# Altium PCB JacdacEdgeConnectorDimsTest 92.PcbDoc
Units mm, origin at the board's own origin, x right, y up, seen from the top; angles counter-clockwise.
Board outline 84.54 x 20.7 mm, 2 copper layers (Top Layer, Bottom Layer), stack 1.525 mm thick; 16 components, 0 nets, 176 pads, 16 vias.
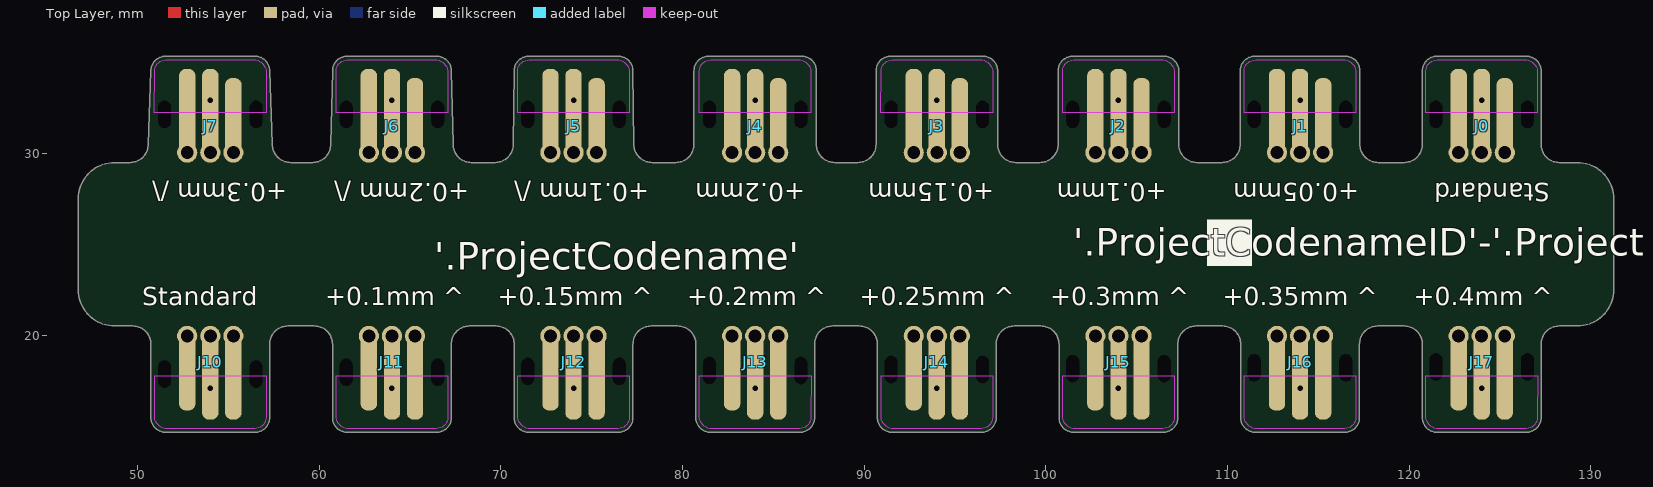
[diagram p0: Top Layer view]
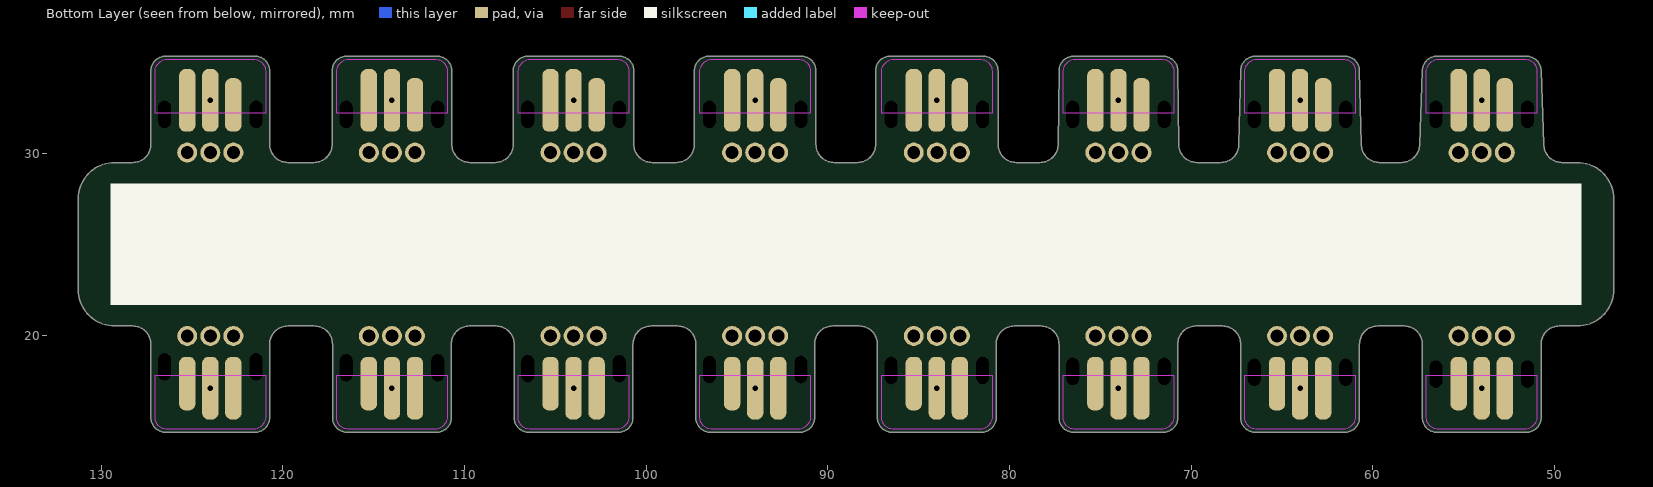
[diagram p1: Bottom Layer view, seen from below]

## Layer stack, top to bottom
Top Solder: solder mask 0.0102, Solder Resist, Dk 3.5
Top Layer: signal copper 0.0356
Dielectric 1: core 1.454, FR-4, Dk 4.2
Bottom Layer: signal copper 0.0356
Bottom Solder: solder mask 0.0102, Solder Resist, Dk 3.5

## Board outline
50.73,15.45 ccw(c51.53,15.45) 51.53,14.65 56.47,14.65 ccw(c56.47,15.45) 57.27,15.45 57.27,19.5 cw(c58.27,19.5) 58.27,20.5 59.73,20.5 cw(c59.73,19.5) 60.73,19.5 60.73,15.45 ccw(c61.53,15.45) 61.53,14.65 66.47,14.65 ccw(c66.47,15.45) 67.27,15.45 67.27,19.5 cw(c68.27,19.5) 68.27,20.5 69.73,20.5 cw(c69.73,19.5) 70.73,19.5 70.73,15.45 ccw(c71.53,15.45) 71.53,14.65 76.47,14.65 ccw(c76.47,15.45) 77.27,15.45 77.27,19.5 cw(c78.27,19.5) 78.27,20.5 79.73,20.5 cw(c79.73,19.5) 80.73,19.5 80.73,15.45 ccw(c81.53,15.45) 81.53,14.65 86.47,14.65 ccw(c86.47,15.45) 87.27,15.45 87.27,19.5 cw(c88.27,19.5) 88.27,20.5 89.73,20.5 cw(c89.73,19.5) 90.73,19.5 90.73,15.45 ccw(c91.53,15.45) 91.53,14.65 96.47,14.65 ccw(c96.47,15.45) 97.27,15.45 97.27,19.5 cw(c98.27,19.5) 98.27,20.5 99.73,20.5 cw(c99.73,19.5) 100.73,19.5 100.73,15.45 ccw(c101.53,15.45) 101.53,14.65 106.47,14.65 ccw(c106.47,15.45) 107.27,15.45 107.27,19.5 cw(c108.27,19.5) 108.27,20.5 109.73,20.5 cw(c109.73,19.5) 110.73,19.5 110.73,15.45 ccw(c111.53,15.45) 111.53,14.65 116.47,14.65 ccw(c116.47,15.45) 117.27,15.45 117.27,19.5 cw(c118.27,19.5) 118.27,20.5 119.73,20.5 cw(c119.73,19.5) 120.73,19.5 120.73,15.45 ccw(c121.53,15.45) 121.53,14.65 126.47,14.65 ccw(c126.47,15.45) 127.27,15.45 127.27,19.5 cw(c128.27,19.5) 128.27,20.5 129.27,20.5 ccw(c129.27,22.5) 131.27,22.5 131.27,27.5 ccw(c129.27,27.5) 129.27,29.5 128.27,29.5 cw(c128.27,30.5) 127.27,30.5 127.27,34.55 ccw(c126.47,34.55) 126.47,35.35 121.53,35.35 ccw(c121.53,34.55) 120.73,34.55 120.73,30.5 cw(c119.73,30.5) 119.73,29.5 118.295,29.5 cw(c118.295,30.5) 117.295,30.5 117.295,34.55 ccw(c116.495,34.55) 116.495,35.35 111.505,35.35 ccw(c111.505,34.55) 110.705,34.55 110.705,30.5 cw(c109.705,30.5) 109.705,29.5 108.32,29.5 cw(c108.32,30.5) 107.32,30.5 107.32,34.55 ccw(c106.52,34.55) 106.52,35.35 101.48,35.35 ccw(c101.48,34.55) 100.68,34.55 100.68,30.5 cw(c99.68,30.5) 99.68,29.5 98.345,29.5 cw(c98.345,30.5) 97.345,30.5 97.345,34.55 ccw(c96.545,34.55) 96.545,35.35 91.455,35.35 ccw(c91.455,34.55) 90.655,34.55 90.655,30.5 cw(c89.655,30.5) 89.655,29.5 88.37,29.5 cw(c88.37,30.5) 87.37,30.5 87.37,34.55 ccw(c86.57,34.55) 86.57,35.35 81.43,35.35 ccw(c81.43,34.55) 80.63,34.55 80.63,30.5 cw(c79.63,30.5) 79.63,29.5 78.32,29.5 cw(c78.32,30.5) 77.32,30.5 77.27,34.55 ccw(c76.47,34.55) 76.47,35.35 71.53,35.35 ccw(c71.53,34.55) 70.73,34.55 70.68,30.5 cw(c69.68,30.5) 69.68,29.5 68.37,29.5 cw(c68.37,30.5) 67.37,30.5 67.27,34.55 ccw(c66.47,34.55) 66.47,35.35 61.53,35.35 ccw(c61.53,34.55) 60.73,34.55 60.63,30.5 cw(c59.63,30.5) 59.63,29.5 58.42,29.5 cw(c58.42,30.5) 57.42,30.5 57.27,34.55 ccw(c56.47,34.55) 56.47,35.35 51.53,35.35 ccw(c51.53,34.55) 50.73,34.55 50.58,30.5 cw(c49.58,30.5) 49.58,29.5 48.73,29.5 ccw(c48.73,27.5) 46.73,27.5 46.73,22.5 ccw(c48.73,22.5) 48.73,20.5 49.73,20.5 cw(c49.73,19.5) 50.73,19.5

## Design rules (kind name [scope] priority, off if disabled: settings)
AssemblyTestPointUsage [All] p1: valid=2
BoardOutlineClearance [All] p1: gap=0.3 ignorepadtopadclearanceinfootprint=FALSE except(0: Arc-SplitContinuation Track-SplitContinuation SMDPad-SplitContinuation THPad-SplitContinuation Via-SplitContinuation Fill-SplitContinuation Poly-SplitContinuation Region-SplitContinuation Text-OutlineEdge Text-SplitContinuation; 0.2: Region-CavityEdge Region-CutoutEdge Region-SplitBarrior Text-CavityEdge Text-CutoutEdge Text-SplitBarrior)
Clearance [All] p1: gap=0.142 ignorepadtopadclearanceinfootprint=FALSE
ComponentClearance MH5.0KeepoutaAreaClearance [InComponent('MH1') or InComponent('MH2')  or InComponent('MH3') or InComponent('MH4') vs InComponent('D6') or InComponent('D7') or InComponent('D8') or InComponent('D9') or InComponent('D10') or InComponent('D11') or InComponent('D12') or InComponent('D13') or InComponent('C6') or InComponent('C7') or InComponent('C8')  or  InComponent('C9') or  InComponent('C12')] p1: gap=0 collisioncheckmode=3 verticalgap=0 showdistances=FALSE
ComponentClearance [All] p2: gap=0.2 collisioncheckmode=3 verticalgap=0.2 showdistances=FALSE
DiffPairsRouting [All] p1: maxlimit=2 minlimit=0.15 mostfreqgap=0.15 toplayer_minwidth=0.15 toplayer_maxwidth=2 toplayer_prefwidth=0.15 bottomlayer_minwidth=0.15 bottomlayer_maxwidth=2 bottomlayer_prefwidth=0.15 maxuncoupledlength=25
FabricationTestPointUsage [All] p1: valid=2 allowmultiple=FALSE
HoleSize [All] p1: absolutevalues=TRUE maxlimit=5 minlimit=0.2 maxpercent=80.000 minpercent=20.000
HoleToHoleClearance HoleToHoleClearance_J3_J4 [InComponent('J3') vs InComponent('J4')] p1: gap=2.54 allowstackedmicrovias=TRUE
HoleToHoleClearance [All] p2: gap=0.254 allowstackedmicrovias=TRUE
MinimumSolderMaskSliver [All] p1: minsoldermaskwidth=0.005
PlaneClearance [All] p1: clearance=0.3
PlaneConnect [All] p1: planeconnectstyle=Relief reliefexpansion=0.5 reliefentries=4 reliefconductorwidth=0.2 reliefairgap=0.3
PolygonConnect "PolygonConnect GND" [isVIA] p1: connectstyle=Relief reliefconductorwidth=0.2 reliefentries=4 polygonreliefangle="90 Angle" airgapwidth=0.2
PolygonConnect [All] p2: connectstyle=Relief reliefconductorwidth=0.2 reliefentries=4 polygonreliefangle="90 Angle" airgapwidth=0.2
RoutingVias RoutingVias_Power [InNetClass('Power')] p1: holewidth=0.4 width=0.8 viastyle="Through Hole" minholewidth=0.3 minwidth=0.6 maxholewidth=0.4 maxwidth=1
RoutingVias [All] p2: holewidth=0.3 width=0.6 viastyle="Through Hole" minholewidth=0.3 minwidth=0.6 maxholewidth=0.3 maxwidth=0.8
SilkToSilkClearance [All] p1: silktosilkclearance=0.001
SilkToSolderMaskClearance [IsPad] p1: minsilkscreentomaskgap=0.05 clearancetoexposedcopper=TRUE
SolderMaskExpansion [All] p1: expansion=0.075 istentingtop=FALSE
UnRoutedNet [All] p1: checkbadconnections=TRUE
ViasUnderSMD [not ( HasFootprint('JACDAC_EDGE_CONNECTOR_NO_TRACES') or HasFootprint('JACDAC_EDGE_CONNECTOR_NO_TRACES_CABLE_GUIDE') )] p1: allowed=FALSE
Width Width_Power [InNetClass('Power')] p1: maxlimit=1 minlimit=0.2 preferedwidth=0.5
Width [All] p2: maxlimit=1 minlimit=0.13 preferedwidth=0.13 minimp=50.000000 maximp=50.000000 favimp=50.000000
18 further rules are at their usual default settings.

## Components (designator, comment, footprint, x,y, rotation, side; value= is the part's Value field where it differs from the comment)
J0 "3 pin JACDAC edge connector" JACDAC_EDGE_CONNECTOR_NO_TRACES#1 124,29.5 r0 top
J1 "3 pin JACDAC edge connector" JACDAC_EDGE_CONNECTOR_NO_TRACES#1 114,29.5 r0 top
J2 "3 pin JACDAC edge connector" JACDAC_EDGE_CONNECTOR_NO_TRACES#1 104,29.5 r0 top
J3 "3 pin JACDAC edge connector" JACDAC_EDGE_CONNECTOR_NO_TRACES#1 94,29.5 r0 top
J4 "3 pin JACDAC edge connector" JACDAC_EDGE_CONNECTOR_NO_TRACES#1 84,29.5 r0 top
J5 "3 pin JACDAC edge connector" JACDAC_EDGE_CONNECTOR_NO_TRACES#1 74,29.5 r0 top (schematic designator J4)
J6 "3 pin JACDAC edge connector" JACDAC_EDGE_CONNECTOR_NO_TRACES#1 64,29.5 r0 top (schematic designator J5)
J7 "3 pin JACDAC edge connector" JACDAC_EDGE_CONNECTOR_NO_TRACES#1 54,29.5 r0 top
J10 "3 pin JACDAC edge connector" JACDAC_EDGE_CONNECTOR_NO_TRACES#1 54,20.5 r180 top
J11 "3 pin JACDAC edge connector" JACDAC_EDGE_CONNECTOR_NO_TRACES#2 64,20.5 r180 top
J12 "3 pin JACDAC edge connector" JACDAC_EDGE_CONNECTOR_NO_TRACES#3 74,20.5 r180 top
J13 "3 pin JACDAC edge connector" JACDAC_EDGE_CONNECTOR_NO_TRACES#4 84,20.5 r180 top (schematic designator J12)
J14 "3 pin JACDAC edge connector" JACDAC_EDGE_CONNECTOR_NO_TRACES#5 94,20.5 r180 top
J15 "3 pin JACDAC edge connector" JACDAC_EDGE_CONNECTOR_NO_TRACES#6 104,20.5 r180 top (schematic designator J13)
J16 "3 pin JACDAC edge connector" JACDAC_EDGE_CONNECTOR_NO_TRACES#7 114,20.5 r180 top (schematic designator J15)
J17 "3 pin JACDAC edge connector" JACDAC_EDGE_CONNECTOR_NO_TRACES#8 124,20.5 r180 top (schematic designator J14)

## Footprints (in the part's own frame and the unit in brackets; to place one, negate y for a bottom-side part, rotate by r counter-clockwise, add the part's x,y. Pads: shape width x height; smd on the part's side, far side on the other; paste and mask are expansions set on the pad)
JACDAC_EDGE_CONNECTOR_NO_TRACES#1 [mm] "Jacdac 3 pin connector with no traces"
  rrect78% 0.9x2.95 smd far side paste-1 mask+0: 1(-1.27,3.175)
  round 1.11 / inner round 0.71 / far side round 1.1 hole 0.71 paste-0.254 mask+0: 1(1.27,0.55) 2(0,0.55) 3(-1.27,0.55)
  rrect78% 0.9x4.3 smd paste-1 mask+0: 1(1.27,2.5)
  rrect78% 0.9x4.8 smd paste-1 mask+0: 2(0,2.75) 3(-1.27,2.75)
  rrect78% 0.9x3.45 smd far side paste-1 mask+0: 2(0,3.425) 3(1.27,3.425)
  round 0 hole 0.7 slot 1.5 at 90 deg unplated: ""(-2.52,2.65) ""(2.52,2.65)
  Top Layer keep-out region: -3.075,2.75 -3.07,5.033 -2.987,5.341 -2.761,5.567 -2.453,5.65 -2.453,5.65 2.27,5.65 2.545,5.635 2.794,5.516 2.978,5.31 3.07,5.05 3.07,5.05 3.07,2.75
  Bottom Layer lines w0.2: -1.27,0.85 -1.126,0.85
  Bottom Layer keep-out region: -3.07,2.75 -3.07,5.033 -3.023,5.269 -2.889,5.469 -2.689,5.603 -2.453,5.65 -2.453,5.65 2.27,5.65 2.545,5.635 2.794,5.516 2.978,5.31 3.07,5.05 3.07,5.05 3.07,2.75
JACDAC_EDGE_CONNECTOR_NO_TRACES#2 [mm] "Jacdac 3 pin connector with no traces"
  rrect78% 0.9x2.95 smd far side paste-1 mask+0: 1(-1.27,3.175)
  rrect78% 0.9x4.3 smd paste-1 mask+0: 1(1.27,2.5)
  round 1.11 / inner round 0.71 / far side round 1.1 hole 0.71 paste-0.254 mask+0: 1(1.27,0.55) 2(0,0.55) 3(-1.27,0.55)
  rrect78% 0.9x3.45 smd far side paste-1 mask+0: 2(0,3.425) 3(1.27,3.425)
  rrect78% 0.9x4.8 smd paste-1 mask+0: 2(0,2.75) 3(-1.27,2.75)
  round 0 hole 0.7 slot 1.5 at 90 deg unplated: ""(-2.52,2.55) ""(2.52,2.55)
  Top Layer keep-out region: -3.075,2.75 -3.07,5.033 -2.987,5.341 -2.761,5.567 -2.453,5.65 -2.453,5.65 2.27,5.65 2.545,5.635 2.794,5.516 2.978,5.31 3.07,5.05 3.07,5.05 3.07,2.75
  Bottom Layer lines w0.2: -1.126,0.85 -1.27,0.85
  Bottom Layer keep-out region: -3.07,2.75 -3.07,5.033 -3.023,5.269 -2.889,5.469 -2.689,5.603 -2.453,5.65 -2.453,5.65 2.27,5.65 2.545,5.635 2.794,5.516 2.978,5.31 3.07,5.05 3.07,5.05 3.07,2.75
JACDAC_EDGE_CONNECTOR_NO_TRACES#3 [mm] "Jacdac 3 pin connector with no traces"
  rrect78% 0.9x2.95 smd far side paste-1 mask+0: 1(-1.27,3.175)
  rrect78% 0.9x4.3 smd paste-1 mask+0: 1(1.27,2.5)
  round 1.11 / inner round 0.71 / far side round 1.1 hole 0.71 paste-0.254 mask+0: 1(1.27,0.55) 2(0,0.55) 3(-1.27,0.55)
  rrect78% 0.9x3.45 smd far side paste-1 mask+0: 2(0,3.425) 3(1.27,3.425)
  rrect78% 0.9x4.8 smd paste-1 mask+0: 2(0,2.75) 3(-1.27,2.75)
  round 0 hole 0.7 slot 1.5 at 90 deg unplated: ""(-2.52,2.5) ""(2.52,2.5)
  Top Layer keep-out region: -3.075,2.75 -3.07,5.033 -2.987,5.341 -2.761,5.567 -2.453,5.65 -2.453,5.65 2.27,5.65 2.545,5.635 2.794,5.516 2.978,5.31 3.07,5.05 3.07,5.05 3.07,2.75
  Bottom Layer lines w0.2: -1.126,0.85 -1.27,0.85
  Bottom Layer keep-out region: -3.07,2.75 -3.07,5.033 -3.023,5.269 -2.889,5.469 -2.689,5.603 -2.453,5.65 -2.453,5.65 2.27,5.65 2.545,5.635 2.794,5.516 2.978,5.31 3.07,5.05 3.07,5.05 3.07,2.75
JACDAC_EDGE_CONNECTOR_NO_TRACES#4 [mm] "Jacdac 3 pin connector with no traces"
  rrect78% 0.9x2.95 smd far side paste-1 mask+0: 1(-1.27,3.175)
  rrect78% 0.9x4.3 smd paste-1 mask+0: 1(1.27,2.5)
  round 1.11 / inner round 0.71 / far side round 1.1 hole 0.71 paste-0.254 mask+0: 1(1.27,0.55) 2(0,0.55) 3(-1.27,0.55)
  rrect78% 0.9x3.45 smd far side paste-1 mask+0: 2(0,3.425) 3(1.27,3.425)
  rrect78% 0.9x4.8 smd paste-1 mask+0: 2(0,2.75) 3(-1.27,2.75)
  round 0 hole 0.7 slot 1.5 at 90 deg unplated: ""(-2.52,2.45) ""(2.52,2.45)
  Top Layer keep-out region: -3.075,2.75 -3.07,5.033 -2.987,5.341 -2.761,5.567 -2.453,5.65 -2.453,5.65 2.27,5.65 2.545,5.635 2.794,5.516 2.978,5.31 3.07,5.05 3.07,5.05 3.07,2.75
  Bottom Layer lines w0.2: -1.126,0.85 -1.27,0.85
  Bottom Layer keep-out region: -3.07,2.75 -3.07,5.033 -3.023,5.269 -2.889,5.469 -2.689,5.603 -2.453,5.65 -2.453,5.65 2.27,5.65 2.545,5.635 2.794,5.516 2.978,5.31 3.07,5.05 3.07,5.05 3.07,2.75
JACDAC_EDGE_CONNECTOR_NO_TRACES#5 [mm] "Jacdac 3 pin connector with no traces"
  rrect78% 0.9x2.95 smd far side paste-1 mask+0: 1(-1.27,3.175)
  rrect78% 0.9x4.3 smd paste-1 mask+0: 1(1.27,2.5)
  round 1.11 / inner round 0.71 / far side round 1.1 hole 0.71 paste-0.254 mask+0: 1(1.27,0.55) 2(0,0.55) 3(-1.27,0.55)
  rrect78% 0.9x3.45 smd far side paste-1 mask+0: 2(0,3.425) 3(1.27,3.425)
  rrect78% 0.9x4.8 smd paste-1 mask+0: 2(0,2.75) 3(-1.27,2.75)
  round 0 hole 0.7 slot 1.5 at 90 deg unplated: ""(-2.52,2.4) ""(2.52,2.4)
  Top Layer keep-out region: -3.075,2.75 -3.07,5.033 -2.987,5.341 -2.761,5.567 -2.453,5.65 -2.453,5.65 2.27,5.65 2.545,5.635 2.794,5.516 2.978,5.31 3.07,5.05 3.07,5.05 3.07,2.75
  Bottom Layer lines w0.2: -1.126,0.85 -1.27,0.85
  Bottom Layer keep-out region: -3.07,2.75 -3.07,5.033 -3.023,5.269 -2.889,5.469 -2.689,5.603 -2.453,5.65 -2.453,5.65 2.27,5.65 2.545,5.635 2.794,5.516 2.978,5.31 3.07,5.05 3.07,5.05 3.07,2.75
JACDAC_EDGE_CONNECTOR_NO_TRACES#6 [mm] "Jacdac 3 pin connector with no traces"
  rrect78% 0.9x2.95 smd far side paste-1 mask+0: 1(-1.27,3.175)
  rrect78% 0.9x4.3 smd paste-1 mask+0: 1(1.27,2.5)
  round 1.11 / inner round 0.71 / far side round 1.1 hole 0.71 paste-0.254 mask+0: 1(1.27,0.55) 2(0,0.55) 3(-1.27,0.55)
  rrect78% 0.9x3.45 smd far side paste-1 mask+0: 2(0,3.425) 3(1.27,3.425)
  rrect78% 0.9x4.8 smd paste-1 mask+0: 2(0,2.75) 3(-1.27,2.75)
  round 0 hole 0.7 slot 1.5 at 90 deg unplated: ""(-2.52,2.35) ""(2.52,2.35)
  Top Layer keep-out region: -3.075,2.75 -3.07,5.033 -2.987,5.341 -2.761,5.567 -2.453,5.65 -2.453,5.65 2.27,5.65 2.545,5.635 2.794,5.516 2.978,5.31 3.07,5.05 3.07,5.05 3.07,2.75
  Bottom Layer lines w0.2: -1.126,0.85 -1.27,0.85
  Bottom Layer keep-out region: -3.07,2.75 -3.07,5.033 -3.023,5.269 -2.889,5.469 -2.689,5.603 -2.453,5.65 -2.453,5.65 2.27,5.65 2.545,5.635 2.794,5.516 2.978,5.31 3.07,5.05 3.07,5.05 3.07,2.75
JACDAC_EDGE_CONNECTOR_NO_TRACES#7 [mm] "Jacdac 3 pin connector with no traces"
  rrect78% 0.9x2.95 smd far side paste-1 mask+0: 1(-1.27,3.175)
  rrect78% 0.9x4.3 smd paste-1 mask+0: 1(1.27,2.5)
  round 1.11 / inner round 0.71 / far side round 1.1 hole 0.71 paste-0.254 mask+0: 1(1.27,0.55) 2(0,0.55) 3(-1.27,0.55)
  rrect78% 0.9x3.45 smd far side paste-1 mask+0: 2(0,3.425) 3(1.27,3.425)
  rrect78% 0.9x4.8 smd paste-1 mask+0: 2(0,2.75) 3(-1.27,2.75)
  round 0 hole 0.7 slot 1.5 at 90 deg unplated: ""(-2.52,2.3) ""(2.52,2.3)
  Top Layer keep-out region: -3.075,2.75 -3.07,5.033 -2.987,5.341 -2.761,5.567 -2.453,5.65 -2.453,5.65 2.27,5.65 2.545,5.635 2.794,5.516 2.978,5.31 3.07,5.05 3.07,5.05 3.07,2.75
  Bottom Layer lines w0.2: -1.126,0.85 -1.27,0.85
  Bottom Layer keep-out region: -3.07,2.75 -3.07,5.033 -3.023,5.269 -2.889,5.469 -2.689,5.603 -2.453,5.65 -2.453,5.65 2.27,5.65 2.545,5.635 2.794,5.516 2.978,5.31 3.07,5.05 3.07,5.05 3.07,2.75
JACDAC_EDGE_CONNECTOR_NO_TRACES#8 [mm] "Jacdac 3 pin connector with no traces"
  rrect78% 0.9x2.95 smd far side paste-1 mask+0: 1(-1.27,3.175)
  rrect78% 0.9x4.3 smd paste-1 mask+0: 1(1.27,2.5)
  round 1.11 / inner round 0.71 / far side round 1.1 hole 0.71 paste-0.254 mask+0: 1(1.27,0.55) 2(0,0.55) 3(-1.27,0.55)
  rrect78% 0.9x3.45 smd far side paste-1 mask+0: 2(0,3.425) 3(1.27,3.425)
  rrect78% 0.9x4.8 smd paste-1 mask+0: 2(0,2.75) 3(-1.27,2.75)
  round 0 hole 0.7 slot 1.5 at 90 deg unplated: ""(-2.52,2.25) ""(2.52,2.25)
  Top Layer keep-out region: -3.075,2.75 -3.07,5.033 -2.987,5.341 -2.761,5.567 -2.453,5.65 -2.453,5.65 2.27,5.65 2.545,5.635 2.794,5.516 2.978,5.31 3.07,5.05 3.07,5.05 3.07,2.75
  Bottom Layer lines w0.2: -1.126,0.85 -1.27,0.85
  Bottom Layer keep-out region: -3.07,2.75 -3.07,5.033 -3.023,5.269 -2.889,5.469 -2.689,5.603 -2.453,5.65 -2.453,5.65 2.27,5.65 2.545,5.635 2.794,5.516 2.978,5.31 3.07,5.05 3.07,5.05 3.07,2.75

## Part data
J0 J1 J2 J3 J4 J5 J6 J7 J10 J11 J12 J13 J14 J15 J16 J17: library part "Jacdac edge connector", "3 pin Jacdac edge connector 1.27mm pitch", Manufacturer Part Number=JACDAC_EDGE_CONNECTOR, Checked By=?, ComponentLink1Description="Yuliang JACDAC cable connector drawing online", ComponentLink1URL=https://github.com/microsoft/jacdac-mdk/blob/main/connector/JACDAC-Connector-by-Yuliang-2020-11-28.pdf, ComponentLink2Description="JACDAC PCB edge connector spec onlin", ComponentLink2URL=https://github.com/microsoft/jacdac-mdk/blob/main/connector/JACDAC_PCB_Edge_Connector_Drawing_JD-PEC-01_rev_01.pdf, Created By="D. Gakure"

## Via types
v1: diameter 0.6, hole 0.3, Top Layer to Bottom Layer, tented both sides, 16 vias

## Nets (pads, with @x,y where several pads share a name; then routed paths per layer and width w, separated by ;. In a path a pad name is that pad's centre, name@x,y a point inside that pad or via, vN(x,y) a via of type N, cw(c..) or ccw(c..) an arc to the next point about the centre after c; other vN are vias at no path point)
pads on no net: J0. J0.1 J0.2 J0.3 J1. J1.1 J1.2 J1.3 J2. J2.1 J2.2 J2.3 J3. J3.1 J3.2 J3.3 J4. J4.1 J4.2 J4.3 J5. J5.1 J5.2 J5.3 J6. J6.1 J6.2 J6.3 J7. J7.1 J7.2 J7.3 J10. J10.1 J10.2 J10.3 J11. J11.1 J11.2 J11.3 J12. J12.1 J12.2 J12.3 J13. J13.1 J13.2 J13.3 J14. J14.1 J14.2 J14.3 J15. J15.1 J15.2 J15.3 J16. J16.1 J16.2 J16.3 J17. J17.1 J17.2 J17.3
copper on no net:
  other v1: 54,17.075 64,17.075 74,17.075 84,17.075 94,17.075 104,17.075 114,17.075 124,17.075 54,32.925 64,32.925 74,32.925 84,32.925 94,32.925 104,32.925 114,32.925 124,32.925

## Other copper
Top Layer:
  text "Top Layer" at 4.85,43.35 h1.7
Bottom Layer:
  text "Bottom Layer" at 4.852,41.85 h1.7

## Silkscreen, mask and mechanical layers (free items; w line width, h text height)
Top Overlay:
  region: 108.877,26.375 108.877,23.8 111.357,23.8 111.357,26.375
  text "Top Overlay" at 17.85,40.05 h1.7
  text "+0.3mm /\" at 58.249,28.35 h1 r180
  text "+0.2mm /\" at 68.249,28.35 h1 r180
  text "+0.1mm /\" at 78.165,28.35 h1 r180
  text "+0.2mm" at 86.749,28.35 h1 r180
  text "+0.15mm" at 97.166,28.35 h1 r180
  text "+0.1mm" at 106.666,28.35 h1 r180
  text "+0.05mm" at 117.249,28.35 h1 r180
  text "Standard" at 127.749,28.35 h1 r180
  text "'.ProjectCodenameID'-'.ProjectRevision'" at 101.525,24.371 h1.5
  text "'.ProjectCodename'" at 66.326,23.6 h1.5
  text "Standard" at 50.251,21.65 h1
  text "+0.1mm ^" at 60.335,21.65 h1
  text "+0.15mm ^" at 69.835,21.65 h1
  text "+0.2mm ^" at 80.251,21.65 h1
  text "+0.25mm ^" at 89.751,21.65 h1
  text "+0.3mm ^" at 100.251,21.65 h1
  text "+0.35mm ^" at 109.751,21.65 h1
  text "+0.4mm ^" at 120.251,21.65 h1
Bottom Overlay:
  region: 48.503,28.35 48.503,21.65 129.497,21.65 129.497,28.35
  text "Bottom Overlay" at 17.852,38.55 h1.7
Top Paste:
  text "Top Paste" at 29.85,42.517 h1.7
Bottom Paste:
  text "Bottom Paste" at 29.852,41.039 h1.7
Top Solder:
  text "Top Solder (resist)" at 29.85,39.717 h1.7
Bottom Solder:
  text "Bottom Solder (resist)" at 29.852,38.228 h1.7
Fabrication notes:
  lines w0.1: 16.4,29.5 46.401,29.496 ; 16.7,32.137 17.05,32.487 ; 16.722,20.4 46.723,20.404 ; 17.022,17.763 17.372,17.413 ; 17.05,29.508 17.05,32.487 ; 17.372,20.392 17.372,17.413 ; 17.4,32.137 17.05,32.487 ; 17.722,17.763 17.372,17.413
  text "Fabrication Notes" at 4.852,40.564 h1.7
  text "non-plated 0.7mm wide slots x16 ->" at 22.002,31.792 h1.7
  text "no board edge pips/ / rat's teeth/mouse bites  / above this line - make  / sure board edge is clean" at 0.203,29.751 h1.7
  text "non-plated 0.7mm wide slots x16 ->" at 22.002,17.617 h1.7
  text "no board edge pips/ / rat's teeth/mouse bites  / below this line - make  / sure board edge is clean" at 0.203,14.886 h1.7
Alignment:
  lines w0.1: 48.73,20.5 cw(c48.73,22.5) 46.73,22.5 46.73,27.5 cw(c48.73,27.5) 48.73,29.5 ; 128.27,20.5 129.27,20.5 ccw(c129.27,22.5) 131.27,22.5 131.27,27.5 ccw(c129.27,27.5) 129.27,29.5
Board Cutout:
  text "Board Cutout" at 4.852,38.014 h1.7
Board Outline:
  the board outline again, w0.1
  text "Board Outline" at 4.852,39.264 h1.7
Top Assy:
  text "Top Assy" at 17.85,42.95 h1.7
Bottom Assy:
  text "Bottom Assy" at 17.852,41.55 h1.7

## Text inside footprints (layer, text, board x,y; h text height)
J0: Mechanical 9 "Jacdac / cable connector  / body" at 119.179,39.508 h1.7
J1: Mechanical 9 "Jacdac / cable connector  / body" at 109.179,39.508 h1.7
J2: Mechanical 9 "Jacdac / cable connector  / body" at 99.179,39.508 h1.7
J3: Mechanical 9 "Jacdac / cable connector  / body" at 89.179,39.508 h1.7
J4: Mechanical 9 "Jacdac / cable connector  / body" at 79.179,39.508 h1.7
J5: Mechanical 9 "Jacdac / cable connector  / body" at 69.179,39.508 h1.7
J6: Mechanical 9 "Jacdac / cable connector  / body" at 59.179,39.508 h1.7
J7: Mechanical 9 "Jacdac / cable connector  / body" at 49.179,39.508 h1.7
J10: Mechanical 9 "Jacdac / cable connector  / body" at 58.821,10.492 h1.7 r180
J11: Mechanical 9 "Jacdac / cable connector  / body" at 68.821,10.492 h1.7 r180
J12: Mechanical 9 "Jacdac / cable connector  / body" at 78.821,10.492 h1.7 r180
J13: Mechanical 9 "Jacdac / cable connector  / body" at 88.821,10.492 h1.7 r180
J14: Mechanical 9 "Jacdac / cable connector  / body" at 98.821,10.492 h1.7 r180
J15: Mechanical 9 "Jacdac / cable connector  / body" at 108.821,10.492 h1.7 r180
J16: Mechanical 9 "Jacdac / cable connector  / body" at 118.821,10.492 h1.7 r180
J17: Mechanical 9 "Jacdac / cable connector  / body" at 128.821,10.492 h1.7 r180